# Altium PCB MB672.PCBDOC (part 3 of 4)
Units mil, origin at the board's own origin, x right, y up, seen from the top; angles counter-clockwise.
Board outline 4505 x 6805 mil, 4 copper layers (TopLayer, GND, VCC, BottomLayer); 337 components, 289 nets, 1516 pads, 621 vias.
Unrouted connection lines stored in the file: 28.
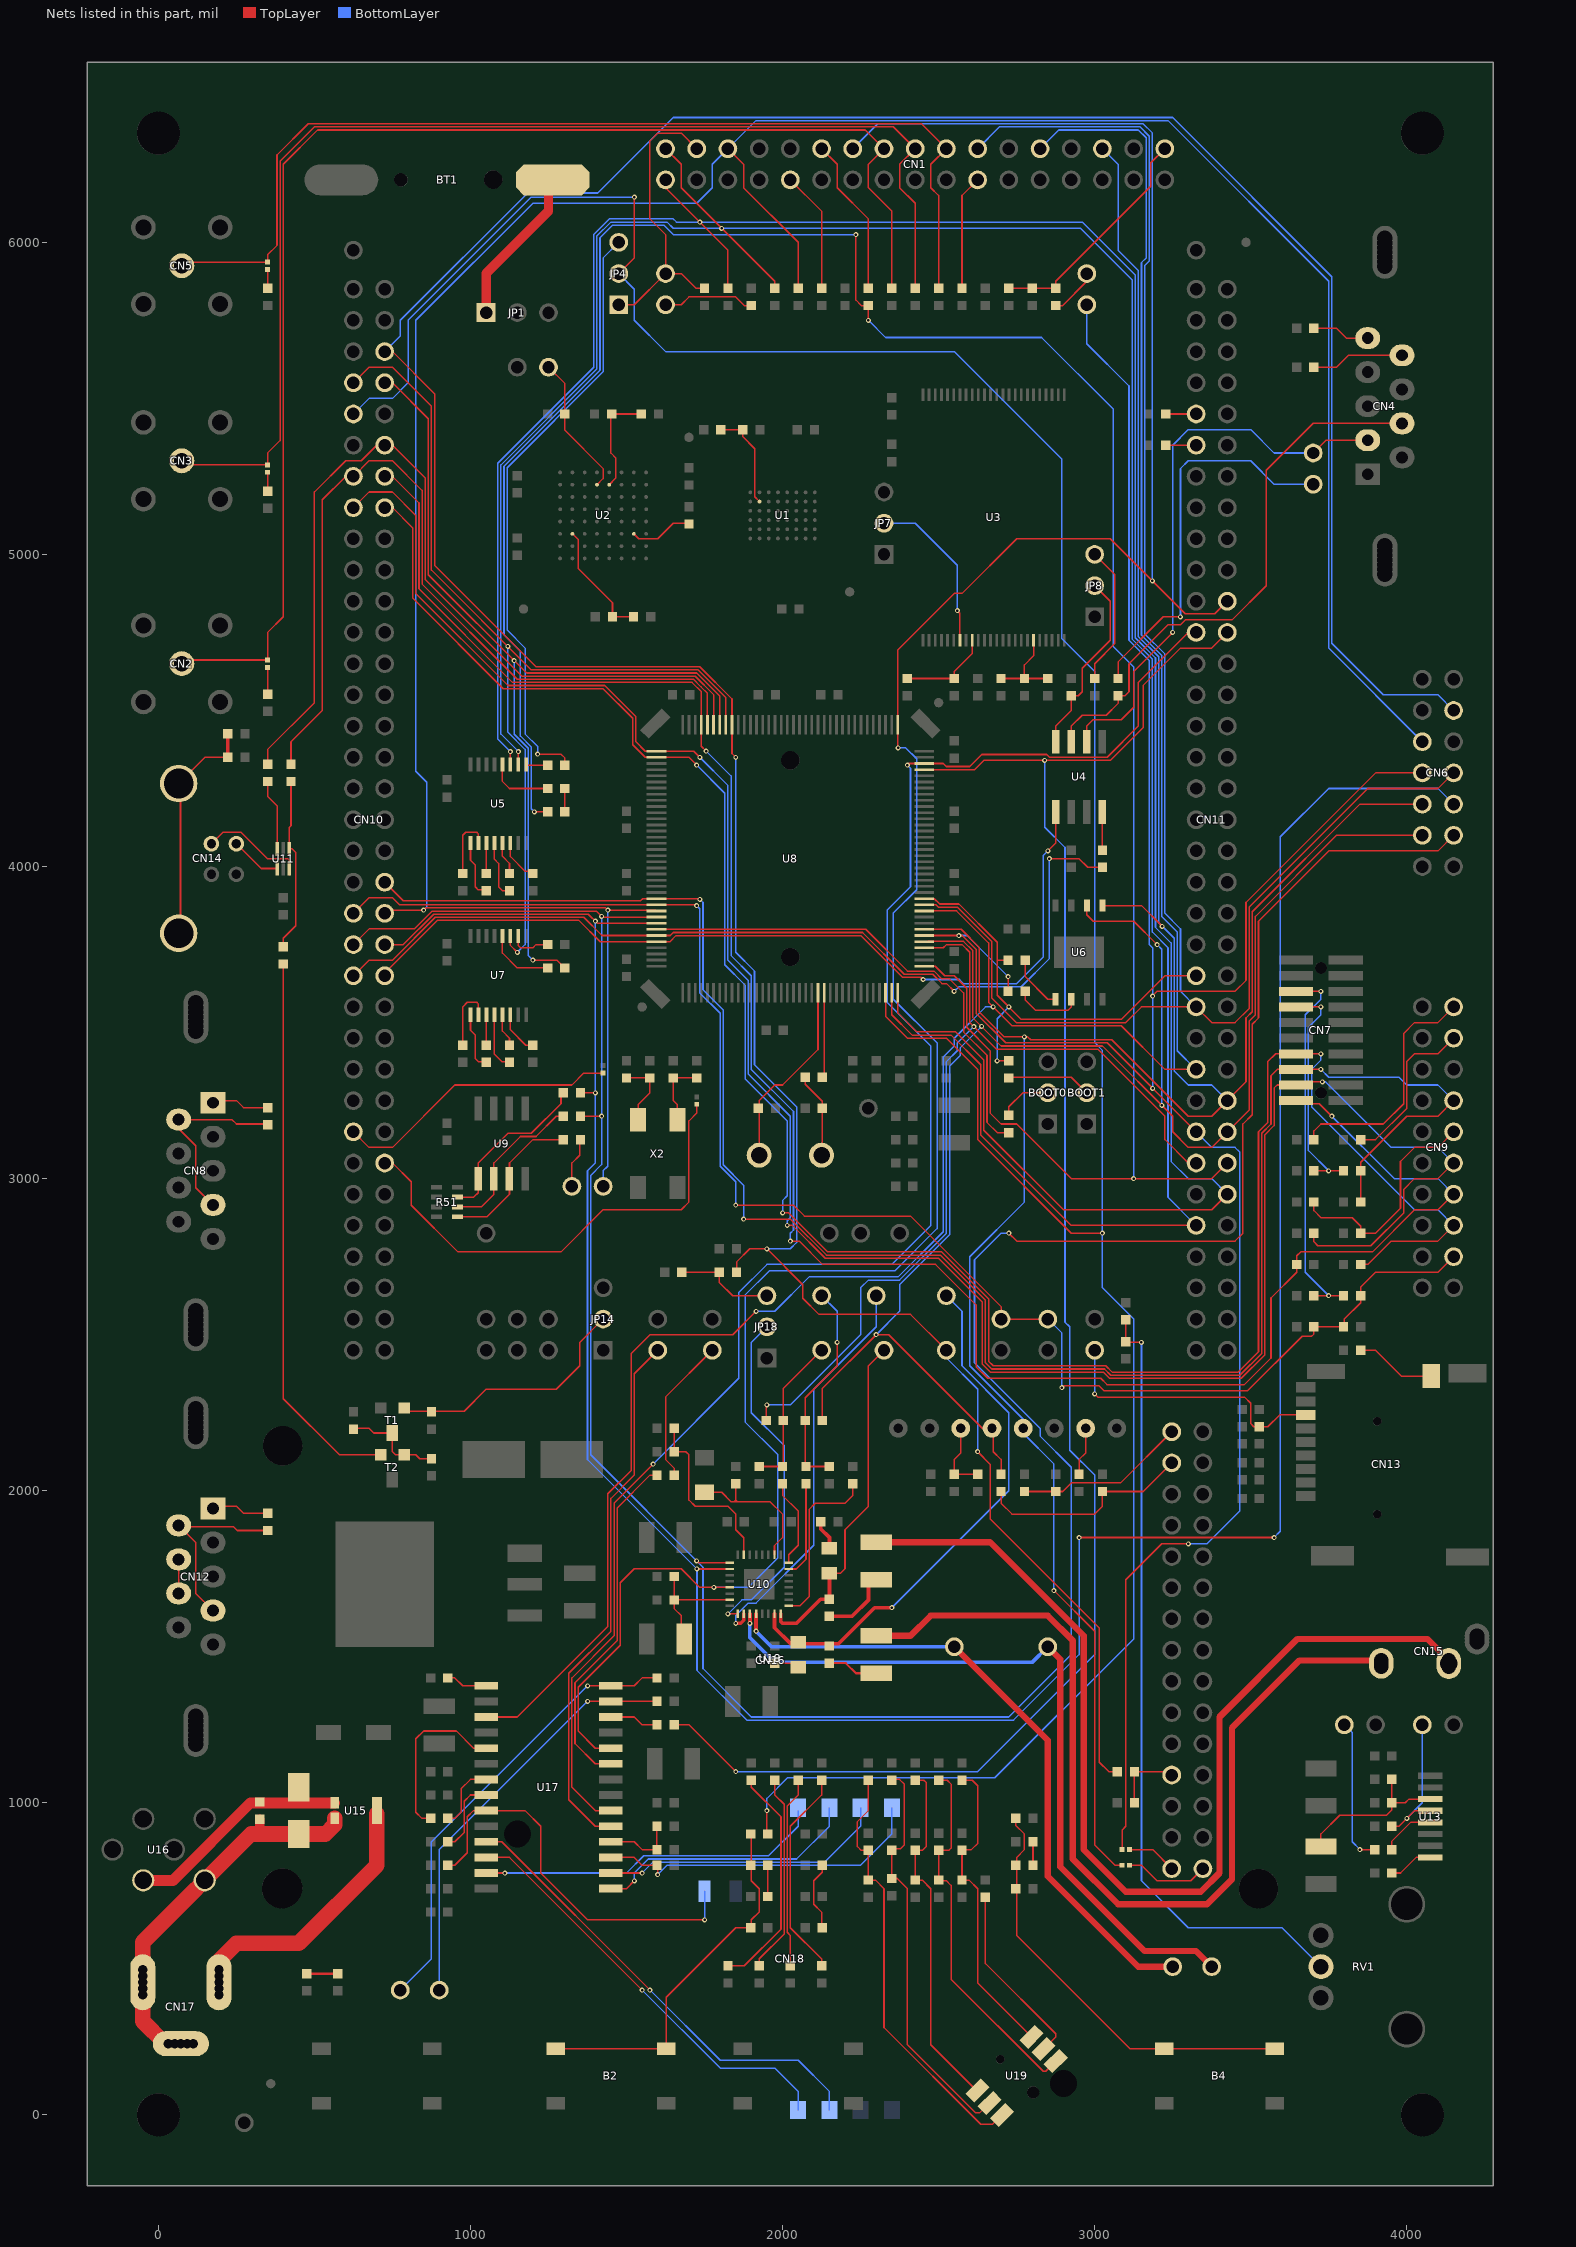
[diagram p5: the nets of this part, all layers, seen from the top]

## Via types
v1: diameter 16, hole 8, TopLayer to BottomLayer, tented both sides, 621 vias

## Nets (pads, with @x,y where several pads share a name; then routed paths per layer and width w, separated by ;. In a path a pad name is that pad's centre, name@x,y a point inside that pad or via, vN(x,y) a via of type N, cw(c..) or ccw(c..) an arc to the next point about the centre after c; other vN are vias at no path point) (continued)
NetB4_2: B4.2 B4.3 C93.2 R106.1 R122.1 | length 1374.1
  TopLayer w5: R106.1@2747.5,950 2747.5,927.5 2775,900 2775,850 2750,825 2750,575 3112.5,212.5 B4.3@3577.17,212.5
NetC2_2: C2.2 JP2.2 | length 296.7
  TopLayer w5: JP2.2@1625,5800 1675,5800 1700,5825 1850,5825 1877.5,5797.5 C2.2@1900,5797.5
NetC28_2: C28.2 U5.2 | length 209
  TopLayer w5: C28.2@975,3977.5 975,4100 985,4110 1020,4110 1025.59,4104.41 U5.2@1025.59,4075
NetC29_1: C29.1 U5.1 | length 182.9
  TopLayer w5: U5.1@1000,4075 1000,4020 1015,4005 1015,3935 1025,3925 C29.1@1047.5,3925
NetC29_2: C29.2 U5.3 | length 96.3
  TopLayer w5: C29.2@1050,3977.5 U5.3@1050,4073.82
NetC31_2: C31.2 U5.6 | length 134.5
  TopLayer w5: U5.6@1127.95,4075 1127.95,4032.05 1175,3985 C31.2@1200,3985
NetC39_2: C39.2 U7.2 | length 216
  TopLayer w5: C39.2@975,3427.5 975,3550 990,3565 1020,3565 1025.59,3559.41 U7.2@1025.59,3525
NetC41_1: C41.1 U7.1 | length 182.9
  TopLayer w5: U7.1@1000,3525 1000,3475 1015,3460 1015,3385 1025,3375 C41.1@1047.5,3375
NetC41_2: C41.2 U7.3 | length 96.3
  TopLayer w5: C41.2@1051.18,3428.68 U7.3@1051.18,3525
NetC42_2: C42.2 U7.6 | length 140.5
  TopLayer w5: U7.6@1127.95,3525 1127.95,3477.05 1177.5,3427.5 C42.2@1200,3427.5
NetC43_1: C43.1 R135.1 X2.1 | length 225
  TopLayer w5: R135.1@1500,3322.5 C43.1@1575,3322.5 1575,3275 1537.01,3237.01 X2.1@1537.01,3188.27
NetC47_1: C47.1 U8.23 X1.2 | length 616.1
  TopLayer w5: X1.2@1902.5,3077.5 X1.2@1902.5,3080 ; X1.2@1925,3075 1925,3250 1975,3300 2000,3300 2113.58,3413.58 U8.23@2113.58,3595.87
NetC48_1: C48.1 R40.2 X1.1 | length 270.3
  TopLayer w5: R40.2@2072.5,3325 2072.5,3302.5 2127.5,3247.5 X1.1@2127.5,3077.5
NetC56_2: C55.2 C56.2 R67.1 TP9.1 | length 498.2
  TopLayer w5: C55.2@1925,2077.5 C56.2@2000,2077.5 C56.2@2000,2080 ; C56.2@2002.5,2080 2002.5,2327.5 TP9.1@2125,2450
NetC57_2: C57.2 C58.2 R68.1 TP6.1 | length 758.2
  TopLayer w5: C57.2@2072.5,2080 2072.5,2297.5 2175,2400 v1(2175,2475) ; C57.2@2075,2077.5 C58.2@2150,2077.5 C57.2@2075,2077.5
  BottomLayer w5: TP6.1@2125,2625 2175,2575 v1(2175,2475)
NetC59_1: C59.1 U10.25 | length 553.6
  TopLayer w5: U10.25@2019.49,1631.1 2056.1,1631.1 2085,1660 2085,1940 2105,1960 2200,1960 2225,1985 C59.1@2225,2022.5
NetC67_2: C67.2 R73.1 | length 96.4
  TopLayer w12: R73.1@2122.5,1900 2122.5,1877.5 2150,1850 C67.2@2150,1815
NetC70_2: C70.2 CN15.2 | length 3356.5
  TopLayer w20: C70.2@2300,1835 2665,1835 2965,1535 2965,850 3100,715 3340,715 3400,775 3400,1275 3650,1525 4065.71,1525 CN15.2@4134.45,1456.26
NetC76_2: C76.2 R86.1 | length 82.5
  TopLayer w5: R86.1@1975,1447.5 C76.2@2057.5,1447.5
NetC78_2: C78.2 CN14.0 R95.2 | length 759.9
  TopLayer w5: CN14.0@65,4266 149,4350 R95.2@222.5,4350 ; CN14.0@70.79,3779.21 CN14.0@70.79,4271.79
  TopLayer w12: R95.2@222.5,4350 C78.2@222.5,4425
NetC80_2: C80.2 CN15.3 | length 3045.7
  TopLayer w20: C80.2@2300,1535 2410,1535 2475,1600 2850,1600 2930,1520 2930,820 3075,675 3360,675 3440,755 3440,1240 3656.26,1456.26 CN15.3@3917.91,1456.26
NetC87_1: C87.1 U17.7 | length 218.2
  TopLayer w5: C87.1@927.5,950 950,950 970,970 970,1045 1000,1075 U17.7@1050,1075
NetC90_2: C90.2 CN18.1 U17.17 | length 1073.5
  TopLayer w5: U17.17@1450,825 1525,825 1550,800 C90.2@1597.5,800 ; v1(1600,770) C90.2@1600,797.5
  BottomLayer w5: v1(1600,770) 1630,800 2250,800 2350,900 CN18.1@2350,984.25
NetC91_1: C91.1 R120.2 | length 100
  TopLayer w5: R120.2@1952.5,700 C91.1@1952.5,800
NetC91_2: B2.2 B2.3 C91.2 R110.1 R123.1 | length 1197.3
  TopLayer w5: B2.2@1272.83,212.5 B2.3@1627.17,212.5 1627.17,377.17 1850,600 R123.1@1897.5,600 ; R123.1@1900,602.5 1900,625 1925,650 1925,725 1900,750 R110.1@1900,897.5
NetC92_1: C92.1 R124.2 | length 219.2
  TopLayer w5: R124.2@2125,602.5 2125,650 2100,675 2100,750 2127.5,777.5 C92.1@2127.5,800
NetC93_1: C93.1 R117.2 | length 75
  TopLayer w5: C93.1@2802.5,800 R117.2@2802.5,875
NetCN1_14: CN1.14 R6.1 | length 368.2
  TopLayer w5: R6.1@2575,5852.5 2575,6150 CN1.14@2625,6200
NetCN1_26: CN1.26 R1.1 | length 388.9
  TopLayer w5: CN1.26@2025,6200 2125,6100 R1.1@2125,5852.5
NetCN7_14: CN7.14 R49.1 R50.1 | length 743.5
  TopLayer w5: CN7.14@3645,3550 v1(3725,3550) ; R49.1@3702.5,3025 R50.1@3797.5,3025
  BottomLayer w5: v1(3725,3550) 3725,3525 3685,3485 3685,3090 v1(3750,3025)
NetCN7_16: CN7.16 R60.1 R61.1 | length 1201.8
  TopLayer w5: CN7.16@3645,3600 v1(3725,3600) ; R60.1@3702.5,2625 R61.1@3797.5,2625
  BottomLayer w5: v1(3725,3600) 3725,3575 3675,3525 3675,2700 v1(3750,2625)
NetCN9_11: CN9.11 R52.2 R55.1 | length 740.7
  TopLayer w5: R52.2@3702.5,2925 3702.5,2897.5 3725,2875 3825,2875 3852.5,2847.5 R55.1@3852.5,2825 3900,2825 3980,2905 3980,3055 4025,3100 4100,3100 CN9.11@4150,3150
NetCN9_17: CN9.17 R48.1 | length 520
  TopLayer w5: R48.1@3852.5,3125 3900,3125 4000,3225 4000,3375 4025,3400 4100,3400 CN9.17@4150,3450
NetCN9_19: CN9.19 R47.1 | length 771.5
  TopLayer w5: R47.1@3702.5,3125 3702.5,3152.5 3725,3175 3925,3175 3990,3240 3990,3465 4025,3500 4100,3500 CN9.19@4150,3550
NetCN10_58: CN10.58 JP10.1 | length 1526.8
  TopLayer w5: CN10.58@725,3050 750,3050 810,2990 810,2915 960,2765 1290,2765 1425,2900 1675,2900 1700,2925 1700,3185 1725,3210 JP10.1@1725,3238.19
NetCN12_7: CN12.7 CN12.8 | length 105
  TopLayer w5: CN12.8@65,1675 CN12.7@65,1780
NetCN14_2: CN14.2 U11.1 | length 163.2
  TopLayer w5: CN14.2@250,4073 329.3,3993.7 U11.1@380.32,3993.7
NetCN14_3: CN14.3 U11.3 | length 347.2
  TopLayer w5: CN14.3@170,4073 207,4110 265,4110 350,4025 415,4025 419.68,4020.32 U11.3@419.68,3993.7
  TopLayer w7: U11.3@419.68,3975.32 U11.3@419.68,3993.7
NetCN17_1: CN17.1 U15.1 | length 886.7
  TopLayer w50: CN17.1@194.09,405 194.09,494.09 250,550 450,550 700,800 U15.1@700,965
NetCN17_3: C85.2 CN17.2 CN17.3 U15.2 U16.2 Z1.1 | length 1270.5
  TopLayer w30: 325,900.2 C85.2@325,947.5
  TopLayer w50: CN17.2@100,230 20,230 -50,300 -50,553.15 297.05,900.2 535.2,900.2 565,930 U15.2@565,950
NetCN18_2: CN18.2 U17.16 | length 921.4
  TopLayer w5: U17.16@1450,775 v1(1550,775)
  BottomLayer w5: v1(1550,775) 1585,810 2135,810 2250,925 CN18.2@2250,984.25
NetCN18_3: CN18.3 U17.15 | length 856.7
  TopLayer w5: U17.15@1450,725 1500,725 v1(1525,750)
  BottomLayer w5: v1(1525,750) 1525,775 1570,820 2045,820 2150,925 CN18.3@2150,984.25
NetJP1_1: BT1.1 JP1.1 | length 915.7
  TopLayer w5: JP1.1@1050,5775 1050,5900 1250,6100
  TopLayer w30: JP1.1@1050,5775 1050,5900 1250,6100 BT1.1@1250,6200
NetJP3_2: JP3.2 R8.2 | length 157.1
  TopLayer w5: R8.2@2875,5797.5 2897.5,5797.5 2975,5875 JP3.2@2975,5900
NetJP4_1: C1.2 CN1.31 JP2.1 JP4.1 | length 962.9
  TopLayer w5: JP4.1@1475,5800 1525,5800 JP2.1@1625,5900 ; CN1.31@1725,6300 1675,6350 1600,6350 1575,6325 1575,6075 1625,6025 JP2.1@1625,5900 ; C1.2@1750,5852.5 1722.5,5852.5 1675,5900 JP2.1@1625,5900
NetJP4_3: JP4.3 R30.2 | length 1943.6
  TopLayer w5: v1(1215,4360) 1290,4360 1302.5,4347.5 R30.2@1302.5,4325
  BottomLayer w5: v1(1215,4360) 1215,4385 1175,4425 1175,4700 1117.5,4757.5 1117.5,5277.5 1425,5585 1425,5950 JP4.3@1475,6000
NetJP7_2: JP7.2 U3.7 | length 534.3
  TopLayer w5: v1(2560,4820) 2568.11,4811.89 U3.7@2568.11,4725
  BottomLayer w5: JP7.2@2325,5100 2425,5100 2560,4965 v1(2560,4820)
NetJP8_3: JP8.3 R27.1 | length 451.3
  TopLayer w5: R27.1@3000,4602.5 3000,4650 3065,4715 3065,4935 JP8.3@3000,5000
NetJP9_2: CN10.55 JP9.2 | length 919.4
  TopLayer w5: CN10.55@625,3150 675,3100 750,3100 950,3300 1325,3300 1363.19,3338.19 JP9.2@1425,3338.19
NetJP11_2: JP11.2 R46.2 | length 157.9
  TopLayer w5: JP11.2@1325,2975 1325,3050 1350,3075 R46.2@1350,3122.5
NetJP15_2: JP15.2 U17.19 | length 1728.3
  TopLayer w5: U17.19@1450,925 1400,925 1315,1010 1315,1415 1450,1550 1450,1975 1525,2050 1525,2375 JP15.2@1600,2450
NetJP16_2: JP16.2 R71.1 | length 473.5
  TopLayer w5: R71.1@1652.5,2050 1652.5,2072.5 1625,2100 1625,2300 JP16.2@1775,2450
NetJP17_2: CN13.7 JP17.2 R130.2 | length 913.9
  TopLayer w5: v1(3000,2310) 3010,2300 3480,2300 3500,2280 3500,2215 3510,2205 3555,2205 3592.91,2242.91 CN13.7@3676.65,2242.91
  BottomLayer w5: v1(3000,2310) JP17.2@3000,2450
NetJP18_2: JP18.2 U10.17 | length 1107.6
  TopLayer w5: v1(1825,1605) 1825.51,1605.51 U10.17@1856.1,1605.51
  BottomLayer w5: v1(1825,1605) 1870,1650 1900,1650 2005,1755 2005,2145 1900,2250 1900,2475 JP18.2@1950,2525
NetJP21_1: JP21.1 R88.1 U13.5 | length 463.8
  TopLayer w5: R88.1@3952.5,925 3975,925 4024.61,974.61 U13.5@4075,974.61
  BottomLayer w5: v1(4000,950) 4050,1000 JP21.1@4050,1250
NetJP22_2: JP22.2 R89.2 | length 468.2
  TopLayer w5: v1(3850,850) R89.2@3897.5,850
  BottomLayer w5: JP22.2@3800,1250 3825,1225 3825,875 v1(3850,850)
NetJP25_2: JP25.2 R138.1 | length 60.7
  TopLayer w5: R138.1@350,5852.5 JP25.2@350,5913.19
NetJP26_2: CN16.29 JP26.2 | length 160.5
  TopLayer w5: JP26.2@3111.81,850 3186,850 CN16.29@3247,789
NetJP27_2: CN16.30 JP27.2 | length 272.1
  TopLayer w5: JP27.2@3111.81,800 3150,800 3200,750 3308,750 CN16.30@3347,789
NetLD1_1: LD1.1 R96.1 | length 677.8
  TopLayer w5: LD1.1@2125,477.5 2125,500 2025,600 2025,925 2125,1025 R96.1@2125,1072.5
NetLD2_1: LD2.1 R97.1 | length 613.6
  TopLayer w5: LD2.1@2025,477.5 2025,575 2015,585 2015,990 2050,1025 R97.1@2050,1072.5
NetLD3_1: LD3.1 R98.1 | length 640.6
  TopLayer w5: LD3.1@1925,477.5 1925,500 2005,580 2005,995 1975,1025 R98.1@1975,1072.5
NetLD4_1: LD4.1 R99.1 | length 735.5
  TopLayer w5: LD4.1@1825,477.5 1877.5,477.5 1995,595 1995,955 1900,1050 R99.1@1900,1072.5
NetR2_2: CN1.23 R2.2 | length 509.6
  TopLayer w5: CN1.23@2125,6300 2175,6250 2175,6175 2275,6075 R2.2@2275,5852.5
NetR3_2: CN1.19 CN2.5 JP23.1 R3.2 | length 4376.8
  TopLayer w5: CN2.5@76.81,4661.81 JP23.1@350,4661.81 350,4750 400,4800 400,6250 510,6360 2265,6360 CN1.19@2325,6300 2275,6250 2275,6175 2350,6100 R3.2@2350,5852.5
NetR4_2: CN1.17 CN3.5 JP24.1 R4.2 | length 3850
  TopLayer w5: CN3.5@88.19,5286.81 JP24.1@350,5286.81 350,5325 390,5365 390,6260 500,6370 2355,6370 CN1.17@2425,6300 2375,6250 2375,6175 2425,6125 R4.2@2425,5852.5
NetR5_2: CN1.15 CN5.5 JP25.1 R5.2 | length 3316.9
  TopLayer w5: CN5.5@86.81,5936.81 JP25.1@350,5936.81 350,5960 380,5990 380,6280 480,6380 2445,6380 CN1.15@2525,6300 2475,6250 2475,6175 2500,6150 R5.2@2500,5852.5
NetR7_1: C8.2 CN1.1 R7.1 R8.1 | length 740
  TopLayer w5: C8.2@2725,5852.5 R8.1@2872.5,5852.5 ; R8.1@2875,5852.5 2875,5875 3180,6180 3180,6255 CN1.1@3225,6300
NetR9_2: CN4.5 R9.2 | length 185.8
  TopLayer w5: R9.2@3702.5,5725 3775,5725 3807,5693 CN4.5@3875,5693
NetR10_2: CN4.9 R10.2 | length 298.2
  TopLayer w5: R10.2@3702.5,5600 3775,5600 3813,5638 CN4.9@3985,5638
NetR11_2: CN11.9 R11.2 | length 97.5
  TopLayer w5: R11.2@3227.5,5450 CN11.9@3325,5450
NetR12_2: JP5.2 R12.2 U2.B4 | length 457.2
  TopLayer w5: JP5.2@1250,5600 1302.5,5547.5 1302.5,5397.5 1425,5275 1425,5243.11 U2.B4@1405.31,5223.43
NetR13_1: C10.1 R13.1 U2.B5 | length 333.7
  TopLayer w5: U2.B5@1444.68,5223.43 1465,5243.74 1465,5310 1450,5325 C10.1@1450,5447.5 ; C10.1@1452.5,5450 R13.1@1547.5,5450
NetR14_1: CN11.11 R14.1 | length 97.5
  TopLayer w5: R14.1@3227.5,5350 CN11.11@3325,5350
NetR16_2: R15.2 R16.2 U1.B5 | length 322.9
  TopLayer w5: R15.2@1802.5,5400 R16.2@1872.5,5400 1872.5,5377.5 1911,5339 1911,5184.47 U1.B5@1926.18,5169.29
NetR19_2: R19.2 U2.F7 | length 201.4
  TopLayer w5: U2.F7@1523.43,5065.94 1539.37,5050 1600,5050 1650,5100 R19.2@1697.5,5100
NetR20_1: R20.1 R21.2 U2.F2 | length 386.6
  TopLayer w5: U2.F2@1326.57,5065.94 1345,5047.52 1345,4955 1455,4845 R20.1@1455,4800 R21.2@1522.5,4800
NetR23_1: R22.2 R23.1 U3.9 | length 296.3
  TopLayer w5: R22.2@2400,4602.5 R23.1@2550,4602.5 2550,4625 2607.48,4682.48 U3.9@2607.48,4725
NetR26_1: JP8.2 R26.1 U4.8 | length 631.4
  TopLayer w5: U4.8@2875,4375 2875,4450 2925,4500 R26.1@2925,4547.5 2947.5,4547.5 2960,4560 2960,4635 3050,4725 3050,4850 JP8.2@3000,4900
NetR28_2: JP6.1 R28.2 | length 1254
  TopLayer w5: R28.2@3075,4602.5 3075,4655 3220,4800 v1(3275,4800)
  BottomLayer w5: v1(3275,4800) 3275,5275 3300,5300 3500,5300 3575,5225 JP6.1@3700,5225
NetR31_2: R29.2 R31.2 | length 75
  TopLayer w5: R31.2@1302.5,4175 R29.2@1302.5,4250
NetR32_1: R32.1 U4.4 | length 122.5
  TopLayer w5: R32.1@3025,4052.5 U4.4@3025,4175
NetR33_1: CN8.4 CN8.6 R33.1 | length 606.9
  TopLayer w5: CN8.4@175,2916 120,2971 120,3105 65,3160 CN8.6@65,3189 236,3189 250,3175 R33.1@347.5,3175
NetR33_2: CN8.1 R33.2 | length 189.3
  TopLayer w5: CN8.1@170,3250 250,3250 272.5,3227.5 R33.2@350,3227.5
NetR35_1: R35.1 U6.1 | length 180
  TopLayer w5: R35.1@2777.5,3700 2777.5,3647.5 2850,3575 U6.1@2875,3575
NetR37_2: R37.2 U6.2 | length 217.6
  TopLayer w5: R37.2@2777.5,3600 2777.5,3572.5 2810,3540 2915,3540 2925,3550 U6.2@2925,3575
NetR38_1: R38.1 R51.4 U9.1 | length 546.1
  TopLayer w5: R51.4@958.5,2940.75 1010.75,2940.75 1025,2955 1025,3050 1120,3145 1195,3145 1290,3240 R38.1@1290,3275
NetR40_1: R40.1 U8.24 | length 269.1
  TopLayer w5: R40.1@2133.27,3326.73 U8.24@2133.27,3595.87
NetR43_2: BOOT1.2 R43.2 | length 268.2
  TopLayer w5: R43.2@2727.5,3325 2925,3325 BOOT1.2@2975,3275
NetR44_1: R44.1 R51.6 U9.2 | length 518
  TopLayer w5: R51.6@958.5,2909.25 1034.25,2909.25 1075,2950 1075,3050 1160,3135 1210,3135 1275,3200 R44.1@1297.5,3200
NetR45_1: R45.1 U8.138 | length 1598
  TopLayer w5: U8.138@1595.87,3798.62 2266.38,3798.62 2400,3665 2485,3665 2510,3640 2535,3640 2580,3595 2580,3470 2655,3395 2655,3180 2687.5,3147.5 R45.1@2725,3147.5
NetR45_2: BOOT0.2 R45.2 | length 171.1
  TopLayer w5: R45.2@2725,3202.5 2725,3230 2770,3275 BOOT0.2@2850,3275
NetR46_1: R46.1 R51.8 U9.3 | length 500
  TopLayer w5: R51.8@958.5,2877.76 1052.76,2877.76 1125,2950 1125,3050 1200,3125 R46.1@1297.5,3125
NetR56_1: JP18.3 R56.1 R57.1 | length 322.6
  TopLayer w5: R56.1@1677.5,2700 R57.1@1797.5,2700 1797.5,2667.5 1840,2625 JP18.3@1950,2625
NetR62_1: CN12.4 CN12.6 R62.1 | length 604.7
  TopLayer w5: CN12.6@65,1889 120,1834 120,1671 CN12.4@175,1616 ; CN12.6@69,1885 240,1885 252.5,1872.5 R62.1@350,1872.5
NetR62_2: CN12.1 R62.2 | length 177.3
  TopLayer w5: CN12.1@182,1950 250,1950 272.5,1927.5 R62.2@350,1927.5
NetR69_1: R69.1 T2.1 | length 1779.6
  TopLayer w5: R69.1@400,3687.5 400,2295 580,2115 T2.1@712.5,2115
NetR70_2: R65.1 R70.2 T1.3 T2.2 | length 322.7
  TopLayer w5: R65.1@627.5,2200 675,2200 690,2185 T1.3@749.5,2185 749.5,2125.5 760,2115 825,2115 837.5,2102.5 R70.2@875,2102.5
NetR74_2: R74.2 R76.1 U18.3 | length 231.2
  TopLayer w5: U18.3@2571.06,2200 2571.06,2121.06 2550,2100 R74.2@2550,2052.5 R76.1@2625,2052.5
NetR75_1: CN16.3 R75.1 R80.2 | length 694.8
  TopLayer w5: R75.1@2700,1997.5 2700,1960 2735,1925 3000,1925 3025,1950 R80.2@3025,1997.5 3155.5,1997.5 CN16.3@3247,2089
NetR78_2: CN16.1 R77.2 R78.2 | length 551.3
  TopLayer w5: R77.2@2775,1997.5 2897.5,1997.5 2925,2025 3083,2025 CN16.1@3247,2189
NetR79_2: R79.2 U18.7 | length 163.7
  TopLayer w5: R79.2@2950,2045 2950,2100 2971.06,2121.06 U18.7@2971.06,2200
NetR83_1: C66.1 C73.1 R83.1 U10.15 | length 386.5
  TopLayer w5: C66.1@1652.5,1725 1652.5,1622.5 1675,1600 C73.1@1675,1525 ; R83.1@1653.29,1650.79 U10.15@1830.51,1650.79
NetR84_1: C70.1 R84.1 | length 211.7
  TopLayer w12: R84.1@2150,1597.5 2222.5,1597.5 2275,1650 C70.1@2275,1715
NetR85_2: C72.1 C77.1 R85.2 U13.6 | length 524.6
  TopLayer w5: C77.1@3725,860 3725,900 3785,960 3935,960 3952.5,977.5 C72.1@3952.5,1075 ; R85.2@3952.5,1000 3995,1000 4007.01,1012.01 U13.6@4075,1012.01
NetR87_1: C80.1 R87.1 | length 163.5
  TopLayer w7: R87.1@2150,1447.5 2202.5,1447.5 2235,1415 C80.1@2300,1415
NetR89_1: R89.1 U13.4 | length 174.7
  TopLayer w5: R89.1@3952.5,850 3952.5,877.5 4012.2,937.2 U13.4@4075,937.2
NetR90_2: R90.2 U17.1 | length 132.9
  TopLayer w5: R90.2@927.5,1400 950,1400 975,1375 U17.1@1050,1375
NetR92_2: R92.2 U13.1 | length 143.2
  TopLayer w5: R92.2@3952.5,775 3980,775 4030,825 U13.1@4075,825
NetR100_1: C95.2 R100.1 R112.1 U19.3 | length 1389.5
  TopLayer w5: R112.1@2275,847.5 2252.5,847.5 2240,860 2240,940 2275,975 R100.1@2275,1072.5 ; R112.1@2275,850 C95.2@2275,752.5 2297.5,752.5 2325,725 2325,280 2635,-30 2672.95,-30 U19.3@2702.67,-0.27
NetR101_1: C96.2 R101.1 R113.2 U19.2 | length 1309.1
  TopLayer w5: R101.1@2352.5,1075 2375,1075 2390,1060 2390,865 2377.5,852.5 2350,852.5 C96.2@2350,757.5 2367.5,757.5 2400,725 2400,225 2617.6,7.4 2632.4,7.4 U19.2@2663.7,38.7
NetR102_1: C97.2 R102.1 R114.1 U19.1 | length 1150.4
  TopLayer w5: R102.1@2425,1072.5 2452.5,1072.5 2460,1065 2460,860 2447.5,847.5 R114.1@2425,847.5 C97.2@2425,752.5 2447.5,752.5 2475,725 2475,225 2622.33,77.67 U19.1@2624.73,77.67
NetR103_1: C98.2 R103.1 R115.1 U19.4 | length 1206.4
  TopLayer w5: R103.1@2500,1072.5 2527.5,1072.5 2540,1060 2540,855 2532.5,847.5 R115.1@2500,847.5 C98.2@2500,752.5 2502.5,750 2525,750 2540,735 2540,435 2835,140 2842.95,140 U19.4@2875.27,172.33
NetR104_1: C99.2 R104.1 R116.1 U19.6 | length 1000.5
  TopLayer w5: R116.1@2575,847.5 C99.2@2575,752.5 2597.5,752.5 2625,725 2625,422.6 U19.6@2797.33,250.27 ; R104.1@2575,1072.5 2607.5,1072.5 2625,1055 2625,870 2605,850 R116.1@2577.5,850
NetR105_1: CN16.23 R105.1 R107.1 | length 224.1
  TopLayer w5: R107.1@3127.5,1000 R105.1@3127.5,1100 3236,1100 CN16.23@3247,1089
NetR125_2: R125.2 U19.5 | length 595.4
  TopLayer w5: R125.2@2650,697.5 2650,485 2875,260 2875,250 U19.5@2836.3,211.3
NetR126_2: C100.2 R126.2 RV1.2 | length 2534.9
  TopLayer w5: R126.2@3100,2547.5 C100.2@3100,2477.5 3102.5,2475 v1(3150,2475)
  BottomLayer w5: v1(3150,2475) 3150,750 3300,600 3600,600 RV1.2@3725,475
NetR127_1: LD5.1 R127.1 | length 100
  TopLayer w7: LD5.1@475,452.5 R127.1@575,452.5
NetR128_1: R72.1 R128.1 U10.7 | length 581.5
  TopLayer w5: R128.1@1652.5,2200 R72.1@1652.5,2125 1690,2125 1700,2115 1700,1970 1720,1950 1825,1950 1850,1925 1850,1875 1875.79,1849.21 U10.7@1875.79,1794.49
NetR129_2: CN13.10 R129.2 | length 260.1
  TopLayer w5: R129.2@3852.5,2450 3900,2450 3983.07,2366.93 CN13.10@4078.23,2366.93
NetR136_1: JP23.2 R136.1 | length 85.7
  TopLayer w5: R136.1@350,4552.5 JP23.2@350,4638.19
NetR137_1: JP24.2 R137.1 | length 60.7
  TopLayer w5: R137.1@350,5202.5 JP24.2@350,5263.19
NetT1_2: JP14.2 R66.1 T1.2 | length 806.1
  TopLayer w5: T1.2@785,2255 980,2255 1050,2325 1275,2325 1350,2400 1350,2475 JP14.2@1425,2550
NetTP7_1: TP7.1 U10.18 | length 1301.5
  TopLayer w12: v1(1850,1575) 1865.79,1575 1875.79,1585 U10.18@1875.79,1605.51
  BottomLayer w5: v1(1850,1575) 1850,1600 1890,1640 1915,1640 2100,1825 2100,2325 2300,2525 TP7.1@2300,2625
NetU3_19: C21.2 R24.2 R25.1 U3.19 | length 284.6
  TopLayer w5: R24.2@2700,4602.5 C21.2@2850,4602.5 ; R25.1@2775,4602.5 2775,4645.67 2804.33,4675 U3.19@2804.33,4725
NetU4_6: CN4.2 JP6.2 U4.6 | length 1820.4
  TopLayer w5: U4.6@2975,4390 2975,4450 2995,4470 3085,4470 3125,4510 3125,4625 v1(3250,4750) ; JP6.2@3700,5325 3741,5366 CN4.2@3875,5366
  BottomLayer w5: v1(3250,4750) 3250,5350 3300,5400 3500,5400 3575,5325 JP6.2@3700,5325
NetU4_7: CN4.7 R28.1 U4.7 | length 1805.9
  TopLayer w5: U4.7@2925,4390 2925,4450 2960,4485 3037.5,4485 3075,4522.5 R28.1@3075,4547.5 3097.5,4547.5 3110,4560 3110,4650 3235,4775 3275,4775 3290,4790 3440,4790 3550,4900 3550,5270 3700,5420 CN4.7@3985,5420
NetU5_4: C30.1 U5.4 | length 185.7
  TopLayer w5: U5.4@1076.77,4075 1076.77,4023.23 1090,4010 1090,3935 1102.5,3922.5 C30.1@1125,3922.5
NetU5_5: C30.2 U5.5 | length 106.9
  TopLayer w5: U5.5@1102.36,4075 1102.36,4032.64 1125,4010 C30.2@1125,3977.5
NetU5_9: R30.1 U5.9 | length 66.4
  TopLayer w5: U5.9@1181.1,4325 R30.1@1247.5,4325
NetU5_12: R29.1 U5.12 | length 208.8
  TopLayer w5: U5.12@1102.36,4326.97 1102.36,4272.64 1125,4250 R29.1@1247.5,4250
NetU7_4: C40.1 U7.4 | length 182.1
  TopLayer w5: U7.4@1076.77,3525 1076.77,3398.23 1100,3375 C40.1@1122.5,3375
NetU7_5: C40.2 U7.5 | length 106.9
  TopLayer w5: U7.5@1102.36,3525 1102.36,3472.64 1125,3450 C40.2@1125,3427.5
NetU7_10: R34.1 U7.10 | length 131.3
  TopLayer w5: U7.10@1153.54,3776.97 1153.54,3746.46 1160,3740 1200,3740 1210,3750 R34.1@1247.5,3750
NetU7_12: R36.1 U7.12 | length 219.2
  TopLayer w5: U7.12@1102.36,3776.97 1102.36,3722.64 1150,3675 R36.1@1247.5,3675
NetU10_2: C53.1 C54.1 U10.2 | length 491.8
  TopLayer w5: C53.1@1750,1995 1805,1995 1835,1965 1960,1965 2000,1925 2000,1850 1974.21,1824.21 U10.2@1974.21,1794.49 ; 1845,1965 1850,1970 1855,1965 ; 1850,1965 C54.1@1850,2022.5
NetU10_19: TP13.1 U10.19 U14.2 | length 2424.1
  TopLayer w7: U10.19@1895,1605.04 U10.19@1895.47,1605.51
  TopLayer w12: v1(1895,1575) 1895.47,1575.47 U10.19@1895.47,1605.51
  TopLayer w20: U14.2@2849.61,1500 2890,1459.61 2890,795 3160,525 3325,525 TP13.1@3375,475
  BottomLayer w12: v1(1895,1575) 1895,1530 1975,1450 2799.61,1450 U14.2@2849.61,1500
NetU10_20: TP12.1 U10.20 U14.1 | length 2091.1
  TopLayer w5: U10.20@1915,1605.35 U10.20@1915.16,1605.51
  TopLayer w7: v1(1915,1550) v1@1915.16,1550.16
  TopLayer w12: v1@1915.16,1550.16 U10.20@1915.16,1605.51
  TopLayer w20: U14.1@2550.39,1500 2850,1200.39 2850,765 3140,475 TP12.1@3250,475
  BottomLayer w12: v1(1915,1550) 1965,1500 U14.1@2550.39,1500
NetU10_23: C76.1 R87.2 TP8.1 U10.23 | length 1727.4
  TopLayer w12: U10.23@1974.21,1605.51 1974.21,1560.79 2025,1510 2180,1510 2295,1625 v1(2350,1625)
  BottomLayer w5: v1(2350,1625) 2725,2000 2725,2250 2575,2400 2575,2575 TP8.1@2525,2625
NetU10_24: C67.1 R84.2 TP10.1 U10.24 | length 1105.6
  TopLayer w5: C67.1@2150,1735 2185,1735 2200,1750 2200,1875 2275,1950 2275,2400 TP10.1@2325,2450
  TopLayer w12: U10.24@1993.9,1605.51 1993.9,1581.1 2000,1575 2044.49,1575 2121.99,1652.5 R84.2@2150,1652.5 C67.1@2150,1735
NetU10_31: C57.1 U10.31 | length 310.8
  TopLayer w5: U10.31@2019.49,1749.21 2044.21,1749.21 2075,1780 C57.1@2075,2022.5
NetU10_32: C56.1 U10.32 | length 287
  TopLayer w5: C56.1@2000,2022.5 2000,1985 2050,1935 2050,1825 2019.49,1794.49 U10.32@2019.49,1768.9
NetU11_4: R69.2 R82.2 U11.4 | length 562.5
  TopLayer w5: R69.2@400,3742.5 400,3770 440,3810 440,4045 428.7,4056.3 U11.4@419.68,4056.3 419.68,4125 425,4130.32 R82.2@425,4272.5
NetU11_6: R81.2 U11.6 | length 228.8
  TopLayer w5: R81.2@350,4272.5 350,4225 380.32,4194.68 U11.6@380.32,4056.3
NetU15_3: C85.1 U15.3 U16.1 Z1.2 | length 716.3
  TopLayer w35: U16.1@-48.43,751.57 46.57,751.57 295,1000 U15.3@565,1000
NetU17_5: C87.2 U17.5 | length 548.9
  TopLayer w5: C87.2@872.5,950 845,950 825,970 825,1205 850,1230 955,1230 1010,1175 U17.5@1050,1175
NetU17_8: C89.1 U17.8 | length 243.2
  TopLayer w5: C89.1@927.5,875 950,875 980,905 980,1005 1000,1025 U17.8@1050,1025
NetU17_9: CN18.18 R118.2 U17.9 | length 1286.7
  TopLayer w5: R118.2@927.5,800 950,800 990,840 990,955 1010,975 1175,975 1225,925 1225,775 1375,625 v1(1750,625)
  BottomLayer w5: v1(1750,625) CN18.18@1750,716.54
NetU17_11: CN18.7 U17.11 | length 1490.6
  TopLayer w5: U17.11@1050,875 1100,875 v1(1575,400)
  BottomLayer w5: v1(1575,400) 1800,175 2050,175 2150,75 CN18.7@2150,15.75
NetU17_12: CN18.8 U17.12 | length 1369.9
  TopLayer w5: U17.12@1050,825 1125,825 v1(1550,400)
  BottomLayer w5: v1(1550,400) 1800,150 1975,150 2050,75 CN18.8@2050,15.75
NetU17_13: CN18.4 U17.13 | length 1112.1
  TopLayer w5: U17.13@1050,775 v1(1110,775)
  BottomLayer w5: v1(1110,775) 1500,775 1555,830 1955,830 2050,925 CN18.4@2050,975
NetU17_18: R108.1 R109.2 U17.18 | length 232.9
  TopLayer w5: U17.18@1450,875 1525,875 1550,850 R108.1@1597.5,850 R109.2@1597.5,925
NetU17_23: R71.2 U17.23 | length 1123.8
  TopLayer w5: U17.23@1450,1125 1400,1125 1335,1190 1335,1385 1470,1520 1470,1945 1575,2050 R71.2@1597.5,2050
NetU17_26: R94.1 U17.26 | length 157.9
  TopLayer w5: U17.26@1450,1275 1525,1275 1550,1250 R94.1@1597.5,1250
NetU17_27: R93.2 TP15.1 U17.27 | length 1351.8
  TopLayer w5: v1(1375,1325) R93.2@1605,1325
  BottomLayer w5: TP15.1@900,400 900,850 v1(1375,1325)
NetU17_28: R91.2 TP14.1 U17.28 | length 1456.4
  TopLayer w5: v1(1375,1375) 1525,1375 1550,1400 R91.2@1597.5,1400
  BottomLayer w5: TP14.1@775,400 875,500 875,875 v1(1375,1375)
NetX2_4: C44.1 R39.1 X2.4 | length 214.6
  TopLayer w5: X2.4@1662.99,3188.27 1662.99,3237.01 1650,3250 C44.1@1650,3322.5 R39.1@1725,3322.5
PA0: CN10.9 JP4.2 R110.2 U8.34 | length 9862.3
  TopLayer w5: JP4.2@1475,5900 1525,5950 v1(1525,6145) ; R110.2@1950,902.5 v1(1950,975) ; R110.2@1952.5,900 R110.2@1952.5,902.5 ; U8.34@2330.12,3595.87 2330.12,3519.88 2400,3450 2525,3450 2625,3350 2625,3125 2925,2825 v1(3025,2825)
  BottomLayer w5: CN10.9@625,5450 675,5500 750,5500 800,5550 800,5750.34 1194.66,6145 v1(1525,6145) ; JP4.2@1475,5900 1525,5850 1525,5750 1625,5650 2550,5650 2895,5305 2895,4730 3000,4625 3000,3435.86 3025,3410.86 3025,2650 3125,2550 3125,1525 2680,1080 2016.11,1080 1950,1013.89 v1(1950,975)
PA1: C4.2 CN1.33 CN11.61 U5.10 U8.35 | length 8818.6
  TopLayer w5: U5.10@1153.54,4326.97 v1(1153.54,4368.54) ; CN1.33@1625,6300 1675,6250 1675,6175 1975,5875 C4.2@1975,5852.5 ; U8.35@2349.8,3595.87 2349.8,3525.2 2415,3460 2540,3460 2635,3365 2635,3140 2925,2850 CN11.61@3325,2850
  BottomLayer w5: v1(1153.54,4368.54) 1097.5,4424.59 1097.5,5286.64 1405,5594.14 1405,6020 1450,6065 1630,6065 1650,6045 2955,6045 3120,5880 3120,4729 3185,4664 3185,3790 3235,3740 3235,2940 CN11.61@3325,2850
  other v1: 1805,6045
PA2: C3.2 CN1.34 CN11.60 U5.11 U8.36 | length 8748.5
  TopLayer w5: U5.11@1127.95,4326.97 v1(1127.95,4367.95) ; CN1.34@1625,6200 1625,6175 1825,5975 C3.2@1825,5852.5 ; U8.36@2369.49,3595.87 2369.49,3530.51 2430,3470 2555,3470 2645,3380 2645,3155 2900,2900 3375,2900 CN11.60@3425,2950
  BottomLayer w5: v1(1127.95,4367.95) 1087.5,4408.41 1087.5,5292.5 1395,5600 1395,6025 1445,6075 1650,6075 1660,6065 v1(1734.97,6065.03) ; v1(1734.97,6065.03) 2960,6065 3130,5895 3130,4733.14 3195,4668.14 3195,3805 3245,3755 3245,3055 3300,3000 3375,3000 CN11.60@3425,2950
PA3: CN11.58 R2.1 R31.1 U8.37 | length 8062.8
  TopLayer w5: v1(1205,4175) R31.1@1247.5,4175 ; v1(2235,6025) 2235,5815 2252.5,5797.5 R2.1@2275,5797.5 v1(2275,5750) ; U8.37@2454.13,3680.51 2489.49,3680.51 2520,3650 2550,3650 2590,3610 2590,3485 2665,3410 2665,3210 2700,3175 2750,3175 2925,3000 3375,3000 CN11.58@3425,3050
  BottomLayer w5: v1(1205,4175) 1195,4185 1195,4383.28 1160,4418.28 1160,4690 1107.5,4742.5 1107.5,5282.5 1415,5590 1415,6015 1455,6055 1620,6055 1650,6025 v1(2235,6025) ; v1(2275,5750) 2330,5695 2830,5695 3060,5465 3060,4704.14 3125,4639.14 v1(3125,3000)
PA4: CN11.57 R67.2 U8.40 | length 2981.2
  TopLayer w5: R67.2@1947.5,2225 1947.5,2272.5 v1(1950,2275) ; U8.40@2454.13,3739.57 2514.57,3739.57 2525,3750 2575,3750 2600,3725 2600,3500 2685,3415 3010,3415 3225,3200 3225,3125 3300,3050 CN11.57@3325,3050
  BottomLayer w5: v1(1950,2275) 2025,2275 2250,2500 2250,2650 2275,2675 2375,2675 2525,2825 2525,3375 2560,3410 2560,3434.57 v1(2612.71,3487.29)
PA5: CN6.4 CN11.56 R68.2 R75.2 U6.6 U8.41 U18.4 | length 5716.8
  TopLayer w5: R68.2@2127.5,2225 2127.5,2327.5 v1(2300,2500) 2340,2500 2640,2200 U18.4@2671.06,2200 ; U8.41@2465.75,3760 2580,3760 2610,3730 2610,3515 2700,3425 3025,3425 3250,3200 3250,3150 3300,3100 3375,3100 3495,3220 3495,3505 3515,3525 3515,3840 3775,4100 CN6.4@4050,4100 ; U18.4@2675,2196.06 2675,2125 2700,2100 R75.2@2700,2052.5 ; U6.6@2975,3875 2975,3845.47 2995.47,3825 3125,3825 v1(3200,3750)
  BottomLayer w5: v1(2300,2500) 2375,2575 2375,2660 2535,2820 2535,3360 2570,3395 2570,3419.89 v1(2637.55,3487.45) ; v1(3200,3750) 3215,3735 v1(3215,3235)
PA6: CN6.8 CN11.55 JP3.1 JP26.1 R37.1 U8.42 | length 8058.6
  TopLayer w5: U8.42@2454.13,3778.94 2576.06,3778.94 2620,3735 2620,3530 2715,3435 3040,3435 CN11.55@3325,3150 ; R37.1@2722.5,3600 v1(2722.5,3647.5) ; JP26.1@3088.19,850 3088.19,913.19 3100,925 3100,1715 3215,1830 v1(3300,1830) ; v1@3185.48,3585.48 3200,3600 3450,3600 3485,3635 3485,3885 3900,4300 CN6.8@4050,4300
  BottomLayer w5: v1(2565,3778.94) 2591.06,3778.94 v1(2722.5,3647.5) ; JP3.1@2975,5800 2975,5675 3110,5540 3110,4724.85 3175,4659.85 3175,3750 3185.48,3739.52 v1(3185.48,3289.52) ; v1(3300,1830) 3360.29,1830 3465,1934.71 3465,3085 3450,3100 3375,3100 CN11.55@3325,3150
  other v1: 3185.48,3585
PA7: CN1.5 CN6.6 CN11.54 JP27.1 U6.5 U8.43 U18.5 | length 9107.7
  TopLayer w5: U8.43@2454.13,3798.62 2572.24,3798.62 2630,3740.86 2630,3534.14 2710.14,3454 2786,3454 2795,3445 3055,3445 3300,3200 3375,3200 3485,3310 3485,3515 3505,3535 3505,3855 3850,4200 CN6.6@4050,4200 ; v1(2869.5,1680) 3000,1549.5 3000,865 3065,800 JP27.1@3088.19,800 ; U6.5@3025,3875 3150,3875 v1(3216.52,3808.48)
  BottomLayer w5: v1(2775,3454) 2775,2925 2600,2750 2600,2400 2771.06,2228.94 2771.06,2183.94 2869.5,2085.5 v1(2869.5,1680) ; CN1.5@3025,6300 3075,6250 3075,5975 3140,5910 3140,4737.28 3205,4672.28 3205,3820 3255,3770 3255,3345 3300,3300 3375,3300 CN11.54@3425,3250
PA8: CN6.11 CN10.6 R57.2 R105.2 TP11.1 U8.100 | length 11543
  TopLayer w5: CN10.6@725,5650 750,5650 885,5515 885,4965 1210,4640 1735,4640 1837.99,4537.01 1837.99,4362.01 v1(1850,4350) ; R57.2@1852.5,2700 1852.5,2732.5 1895,2775 v1(1950,2775) 2065,2660 2065,2616.57 2116.57,2565 2410,2565 TP11.1@2525,2450 ; v1(2625,2125) 2665,2085 2665,1910 3015,1560 3015,1130 3045,1100 R105.2@3072.5,1100
  BottomLayer w5: CN10.6@725,5650 775,5700 775,5750 1183.17,6158.17 1408.17,6158.17 1650,6400 3250,6400 3760,5890 3760,4715 3925,4550 4100,4550 CN6.11@4150,4500 ; v1(1850,4350) 1850,3725 1910,3665 1910,3365 2045,3230 2045,2795 2025,2775 v1(1950,2775) ; TP11.1@2525,2450 2525,2425 2625,2325 v1(2625,2125)
PA9: CN10.7 U7.11 U8.101 | length 3121.7
  TopLayer w5: CN10.7@625,5550 675,5600 750,5600 875,5475 875,4950 1195,4630 1730,4630 1818.31,4541.69 U8.101@1818.31,4454.13 ; U7.11@1127.95,3776.97 1127.95,3747.05 v1(1150,3725)
  BottomLayer w5: v1(1120,4705) 1120,4430 1175,4375 1175,3750 v1(1150,3725)
PA10: CN10.8 R36.2 U8.102 | length 2972.2
  TopLayer w5: CN10.8@725,5550 750,5550 865,5435 865,4935 1180,4620 1725,4620 1798.62,4546.38 U8.102@1798.62,4454.13 ; v1(1200,3700) 1277.5,3700 R36.2@1302.5,3675
  BottomLayer w5: v1(1140,4660) 1140,4424.14 1185,4379.14 1185,3715 v1(1200,3700)
PA11: CN10.12 R81.1 U8.103 | length 2893.9
  TopLayer w5: R81.1@350,4327.5 350,4375 500,4525 500,5200 600,5300 650,5300 700,5350 750,5350 855,5245 855,4920 1165,4610 1720,4610 1778.94,4551.06 U8.103@1778.94,4454.13
PA12: CN10.13 R82.1 U8.104 | length 2760.1
  TopLayer w5: R82.1@425,4327.5 425,4400 525,4500 525,5175 600,5250 CN10.13@625,5250 675,5300 750,5300 845,5205 845,4905 1150,4600 1714.25,4600 1738.9,4575.36 1759.25,4555 U8.104@1759.25,4454.13
PA13: CN7.2 CN9.7 CN10.14 R58.1 U8.105 | length 6850.8
  TopLayer w5: CN10.14@725,5250 750,5250 835,5165 835,4890 1135,4590 1710,4590 1739.57,4560.43 1739.57,4385.43 v1(1755,4370) ; v1(2025,2800) 2053.28,2800 2128.28,2725 2490,2725 2620,2595 2620,2397.43 2657.43,2360 3019.14,2360 3039.14,2340 3480,2340 3565,2425 3565,2617.5 3647.5,2700 3647.5,2752.5 3660,2765 3890,2765 4025,2900 4100,2900 CN9.7@4150,2950 ; CN7.2@3595,3240 3720,3240 v1(3760,3200)
  BottomLayer w5: v1(1755,4370) 1835,4290 1835,3715 1900,3650 1900,3350 2035,3215 2035,2835 2025,2825 v1(2025,2800) ; v1(3760,3200) 3960,3000 4100,3000 CN9.7@4150,2950
PA14: CN7.4 CN9.9 CN10.15 R54.2 U8.109 | length 7369.6
  TopLayer w5: CN10.15@625,5150 675,5200 750,5200 825,5125 825,4875 1120,4580 1430,4580 1530,4480 1530,4399.49 1560,4369.49 1715.51,4369.49 v1(1735,4350) ; v1(2015,2850) 2031.57,2850 2136.57,2745 2500,2745 2640,2605 2640,2405.71 2665.71,2380 3027.43,2380 3047.43,2360 3470,2360 3545,2435 3545,3140 3575,3170 3575,3290 3585,3300 CN7.4@3645,3300 ; CN7.4@3645,3310 v1(3730,3310) ; R54.2@3702.5,2825 3702.5,2797.5 3715,2785 3885,2785 3990,2890 3990,2965 4025,3000 4100,3000 CN9.9@4150,3050
  BottomLayer w5: v1(1735,4350) 1825,4260 1825,3700 1890,3635 1890,3335 2025,3200 2025,2875 2015,2865 v1(2015,2850) ; v1(3730,3310) 3740,3310 3950,3100 4100,3100 CN9.9@4150,3050
PA15: CN7.8 CN9.5 CN10.16 R59.1 U8.110 | length 7232
  TopLayer w5: CN10.16@725,5150 750,5150 815,5085 815,4860 1105,4570 1425,4570 1520,4475 1520,4389.8 1560,4349.8 1700.2,4349.8 v1(1725,4325) ; v1(2000,2890) 2019.85,2890 2144.85,2765 2510,2765 2660,2615 2660,2415 2675,2400 3035.71,2400 3055.71,2380 3460,2380 3525,2445 3525,3150 3555,3180 3555,3375 3580,3400 v1(3725,3400) ; R59.1@3852.5,2725 3875,2725 3950,2800 4100,2800 CN9.5@4150,2850
  BottomLayer w5: v1(1725,4325) 1815,4235 1815,3685 1880,3620 1880,3320 2015,3185 2015,2945 2000,2930 v1(2000,2890) ; v1(3725,3400) 3725,3380 3695,3350 3695,3230 4025,2900 4100,2900 CN9.5@4150,2850
PB0: CN1.9 CN11.51 U8.46 U17.3 | length 8010
  TopLayer w5: U17.3@1050,1275 1150,1275 1440,1565 1440,1990 1515,2065 1515,2440 1575,2500 1840,2500 v1(1915,2575) ; U8.46@2454.13,3857.68 2557.32,3857.68 2660,3755 2660,3565 2735,3490 3085,3490 3225,3350 CN11.51@3325,3350
  BottomLayer w5: v1(1915,2575) 1975,2575 2085,2685 2370,2685 2515,2830 2515,3390 2550,3425 2550,3450 2650,3550 v1(2675,3550) ; CN1.9@2825,6300 2885,6360 3140,6360 3165,6335 3165,5950 3150,5935 3150,4741.42 3215,4676.42 3215,3840 3265,3790 3265,3410 CN11.51@3325,3350
PB1: CN1.13 CN6.7 CN11.47 U8.47 | length 5977.4
  TopLayer w5: U8.47@2454.13,3877.36 2491.78,3877.36 2499.14,3870 2560,3870 2670,3760 2670,3579 2749,3500 3100,3500 3150,3550 CN11.47@3325,3550 3375,3500 3450,3500 3495,3545 3495,3870 3875,4250 4100,4250 CN6.7@4150,4300
  BottomLayer w5: CN1.13@2625,6300 2695,6370 3145,6370 3175,6340 3175,5940 3160,5925 3160,4745.56 3225,4680.56 3225,3850 3275,3800 3275,3600 CN11.47@3325,3550
PB2: CN11.45 R35.2 R43.1 U8.48 | length 1449.3
  TopLayer w5: U8.48@2454.13,3897.05 2486.24,3897.05 2503.28,3880 2565,3880 2687.5,3757.5 2687.5,3587.5 2765,3510 3085,3510 3225,3650 CN11.45@3325,3650 ; v1(2687.5,3377.5) R43.1@2725,3377.5 ; 2687.5,3700 R35.2@2722.5,3700
  BottomLayer w5: v1(2687.5,3377.5) 2687.5,3512.5 v1(2725,3550)
PB3: CN7.6 CN9.13 CN10.40 R50.2 R53.1 U8.133 | length 6178.8
  TopLayer w5: CN10.40@725,3950 785,3890 1545,3890 1552.05,3897.05 1732.95,3897.05 v1(1735,3895) ; v1(1875,2870) 2025.71,2870 2140.71,2755 2505,2755 2650,2610 2650,2410 2670,2390 3031.57,2390 3051.57,2370 3465,2370 3535,2440 3535,3145 3565,3175 3565,3330 3585,3350 v1(3725,3350) ; R53.1@3852.5,2925 3852.5,3052.5 4000,3200 4100,3200 CN9.13@4150,3250
  BottomLayer w5: v1(1735,3895) 1745,3885 1745,3605 1810,3540 1810,3044.14 1875,2979.14 v1(1875,2870) ; v1(3725,3350) 3750,3325 3975,3325 4000,3300 4100,3300 CN9.13@4150,3250
PB4: C51.2 CN9.3 CN10.41 JP19.1 JP20.2 R61.2 R64.1 U8.134 | length 5051.1
  TopLayer w5: CN10.41@625,3850 675,3900 750,3900 772.64,3877.36 1722.64,3877.36 v1(1725,3875) ; v1(1850,2915) 2035,2915 2070,2880 2410,2880 2700,2590 JP19.1@2700,2550 JP20.2@2850,2550 ; v1(2895,2330) 2901.84,2336.84 3013.16,2336.84 3030,2320 3490,2320 3665,2495 3695,2495 3702.5,2502.5 C51.2@3702.5,2525 R64.1@3797.5,2525 ; R64.1@3800,2527.5 3800,2550 3852.5,2602.5 3852.5,2652.5 3900,2700 4100,2700 CN9.3@4150,2750
  BottomLayer w5: v1(1725,3875) 1735,3865 1735,3595 1800,3530 1800,3040 1850,2990 v1(1850,2915) ; JP20.2@2850,2550 2895,2505 v1(2895,2330)
PB5: C5.2 CN1.29 CN6.10 CN10.42 JP11.1 U8.135 | length 9261.8
  TopLayer w5: CN10.42@725,3860 v1(850,3860) 857.36,3867.36 1432.64,3867.36 v1(1440,3860) U8.135@1593.54,3860 ; CN1.29@1825,6300 1875,6250 1875,6175 2050,6000 C5.2@2050,5852.5
  BottomLayer w5: v1(850,3860) 860,3870 860,4270 825,4305 825,5750 1200,6125 1725,6125 1775,6175 1775,6250 1915,6390 3235,6390 3750,5875 3750,4700 CN6.10@4050,4400 ; JP11.1@1425,2975 1425,3025 1440,3040 v1(1440,3860)
PB6: CN6.3 CN10.43 R44.2 U8.136 U10.9 | length 9168.5
  TopLayer w5: CN10.43@625,3750 675,3800 820,3800 877.36,3857.36 1402.64,3857.36 1422.01,3837.99 U8.136@1595.87,3837.99 ; R44.2@1352.5,3200 v1(1420,3200) ; v1(1725,1775) 1731.1,1768.9 U10.9@1830.51,1768.9 ; v1(2725,2825) 2750,2800 3450,2800 3475,2825 3475,3175 3505,3205 3505,3495 3525,3515 3525,3825 3750,4050 4100,4050 CN6.3@4150,4100
  BottomLayer w5: v1(1420,3840) 1420,3045 1385,3010 1385,2115 1745,1755 1745,1430 1900,1275 2725,1275 2925,1475 2925,2075 2825,2175 2825,2200 2615,2410 2615,2740 2700,2825 v1(2725,2825)
PB7: CN6.5 CN10.44 R38.2 U8.137 U10.10 | length 8902.2
  TopLayer w5: CN10.44@725,3750 785,3750 882.36,3847.36 1377.64,3847.36 1406.69,3818.31 U8.137@1595.87,3818.31 ; R38.2@1352.5,3275 v1(1400,3275) ; v1(1725.79,1749.21) U10.10@1830.51,1749.21 ; v1(2950,1850) v1(3575,1850)
  BottomLayer w5: v1(1400,3825) 1400,3050 1375,3025 1375,2100 v1(1725.79,1749.21) 1725.79,1424.21 1885,1265 2740,1265 2950,1475 v1(2950,1850) ; v1(3575,1850) 3595,1870 3595,4095 3750,4250 4100,4250 CN6.5@4150,4200
PB8: CN10.45 R32.2 U8.139 | length 2958.8
  TopLayer w5: CN10.45@625,3650 675,3700 750,3700 887.36,3837.36 1362.64,3837.36 1421.06,3778.94 1640.32,3778.94 1650,3788.62 2256.38,3788.62 2390,3655 2480.86,3655 2510.86,3625 2525,3625 v1(2550,3600) ; v1(2855,4025) 2950,4025 2977.5,3997.5 R32.2@3025,3997.5
  BottomLayer w5: v1(2550,3600) 2565,3615 2765,3615 2855,3705 v1(2855,4025)
PB9: CN10.46 U4.1 U8.140 | length 2805.5
  TopLayer w5: CN10.46@725,3650 725,3659.14 893.22,3827.36 1347.64,3827.36 1415.75,3759.25 1639.25,3759.25 1658.62,3778.62 2250.52,3778.62 2384.14,3645 2443,3645 v1(2450,3638) ; v1(2850,4050) 2875,4075 U4.1@2875,4175
  BottomLayer w5: v1(2450,3638) 2567,3638 2580,3625 2750,3625 2835,3710 2835,4035 v1(2850,4050)
PB10: CN11.24 R94.2 U8.69 | length 5728.2
  TopLayer w5: R94.2@1652.5,1250 1700,1250 v1(1850,1100) ; U8.69@2454.2,4310.5 2615.5,4310.5 2645,4340 3050,4340 3155,4445 3155,4580 3275,4700 3375,4700 CN11.24@3425,4750
  BottomLayer w5: v1(1850,1100) 2625,1100 3000,1475 3000,2050 2920,2130 2920,2525 2905,2540 2905,4060.86 2840,4125.86 v1(2840,4340)
PB11: CN11.23 U8.70 U17.20 | length 5433.3
  TopLayer w5: U17.20@1450,975 1400,975 1325,1050 1325,1400 1460,1535 1460,1960 v1(1585,2085) ; v1(2400,4325) 2405.12,4330.12 2514.88,4330.12 2524.5,4320.5 2600,4320.5 2638.44,4358.94 2846.56,4358.94 2855.5,4350 3040,4350 3140,4450 3140,4590 3300,4750 CN11.23@3325,4750
  BottomLayer w5: v1(1585,2085) 1860,2360 1860,2635 1950,2725 2350,2725 2475,2850 2475,3425 2335,3565 2335,3860 2410,3935 2410,4315 v1(2400,4325)
PB12: CN1.21 CN11.22 U8.73 U10.13 U17.24 | length 8627.4
  TopLayer w5: U17.24@1450,1175 1400,1175 1345,1230 1345,1370 1480,1505 1480,1705 1525,1750 1675,1750 1734.84,1690.16 U10.13@1830.51,1690.16 ; v1@1780,1690 v1(1780.16,1690.16) ; v1@2369.49,4380.51 2369.49,4694.49 2550,4875 2575,4875 2750,5050 3050,5050 3290,4810 3385,4810 CN11.22@3425,4850
  BottomLayer w5: v1(1780.16,1690.16) 1890.16,1690.16 1985,1785 1985,2115 1880,2220 1880,2626.72 1958.28,2705 2360,2705 2495,2840 2495,3435 2355,3575 2355,3850.86 2430,3925.86 2430,4345 2395,4380 v1(2370,4380) ; CN1.21@2225,6300 2305,6380 3155,6380 3185,6350 v1(3185,4915)